# Altium PCB SUBBOARD-phase_leg_3p_2L.PcbDoc (part 1 of 2)
Units mm, origin at the board's own origin, x right, y up, seen from the top; angles counter-clockwise.
Board outline 115.25 x 128.45 mm, 2 copper layers (Top Layer, Bottom Layer), stack 1.569 mm thick; 86 components, 43 nets, 270 pads, 85 vias.
Unrouted connection lines stored in the file: 3.
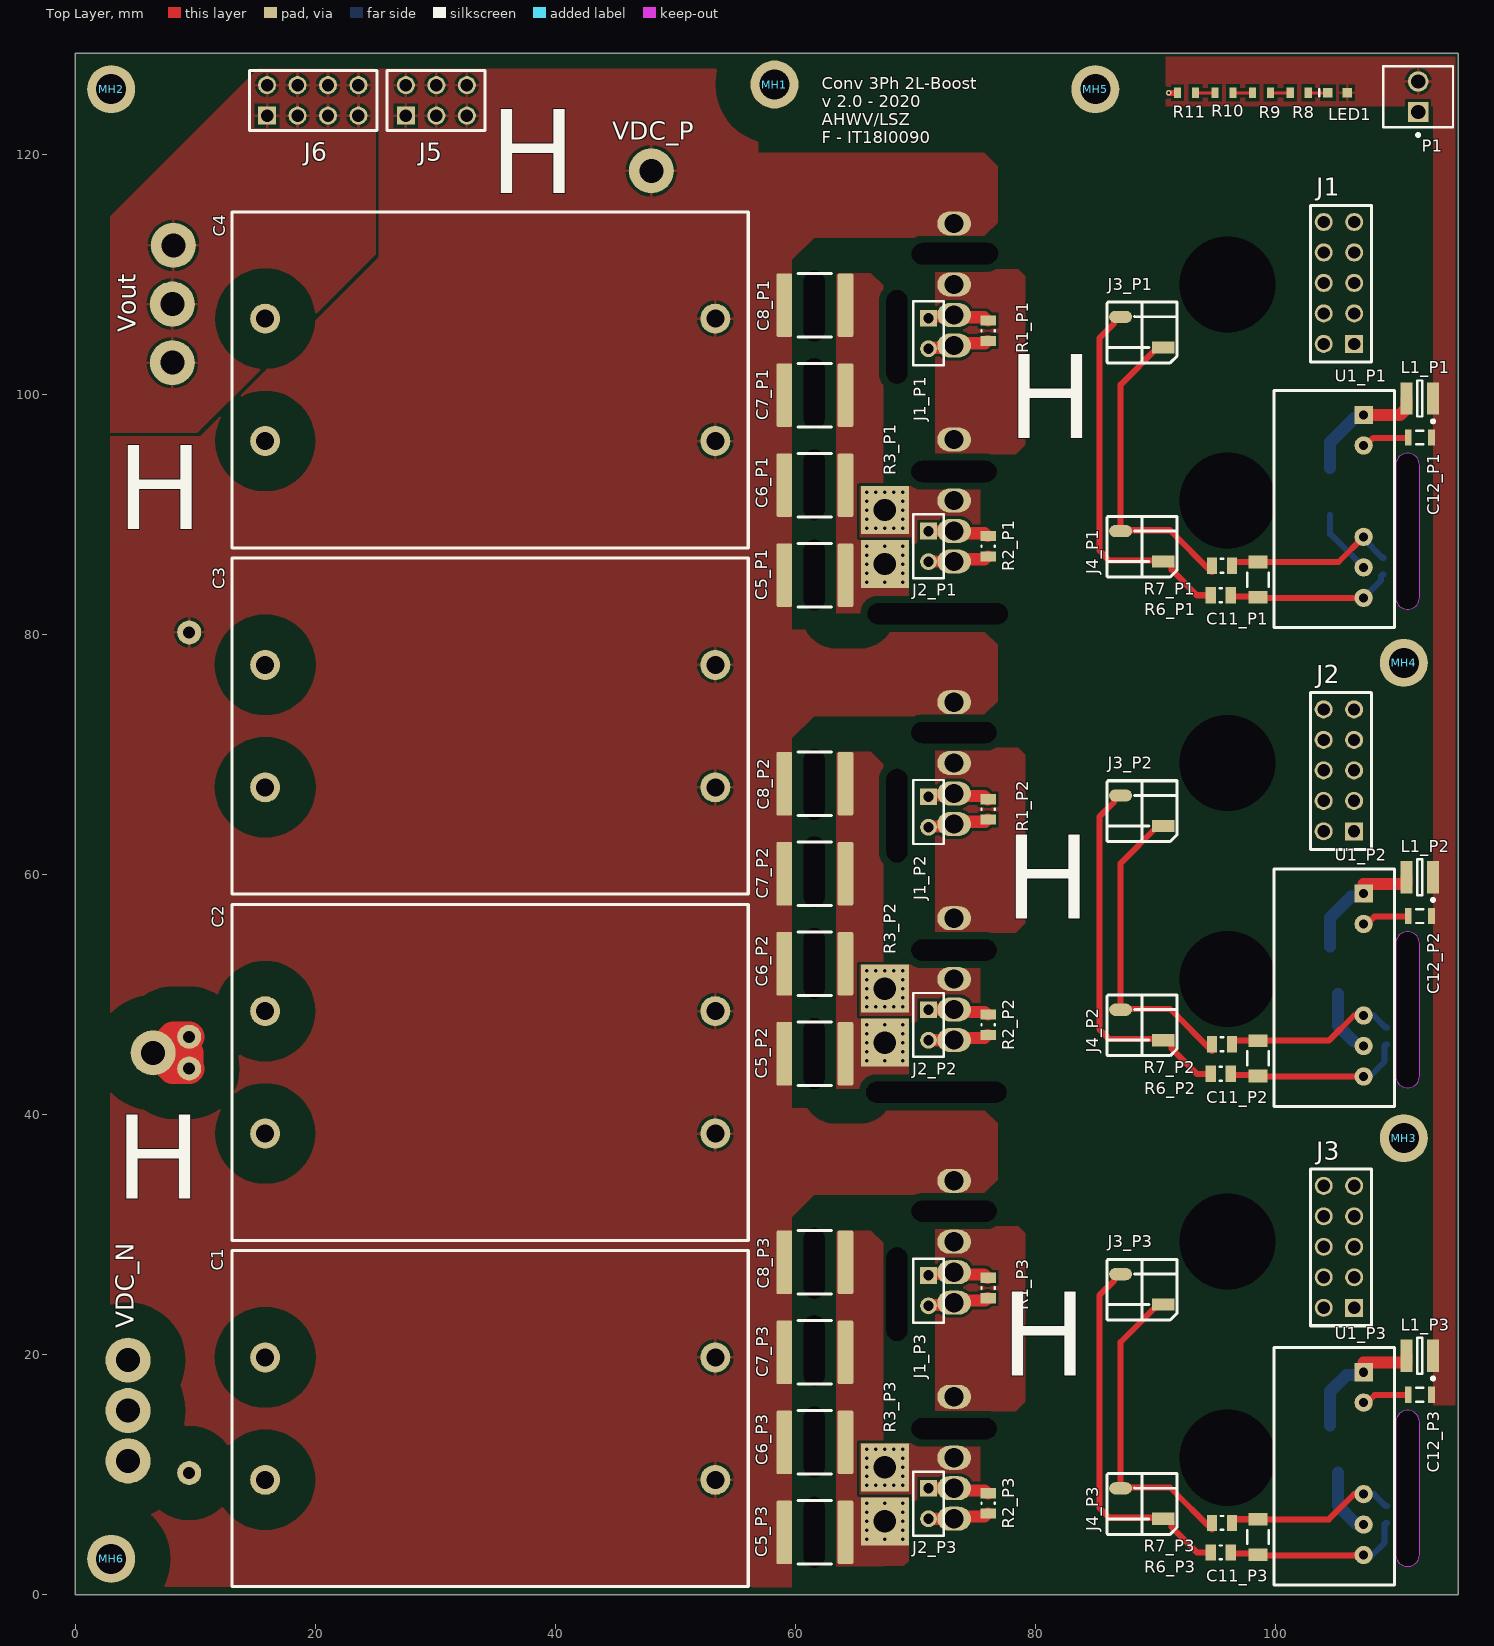
[diagram p0: Top Layer view]
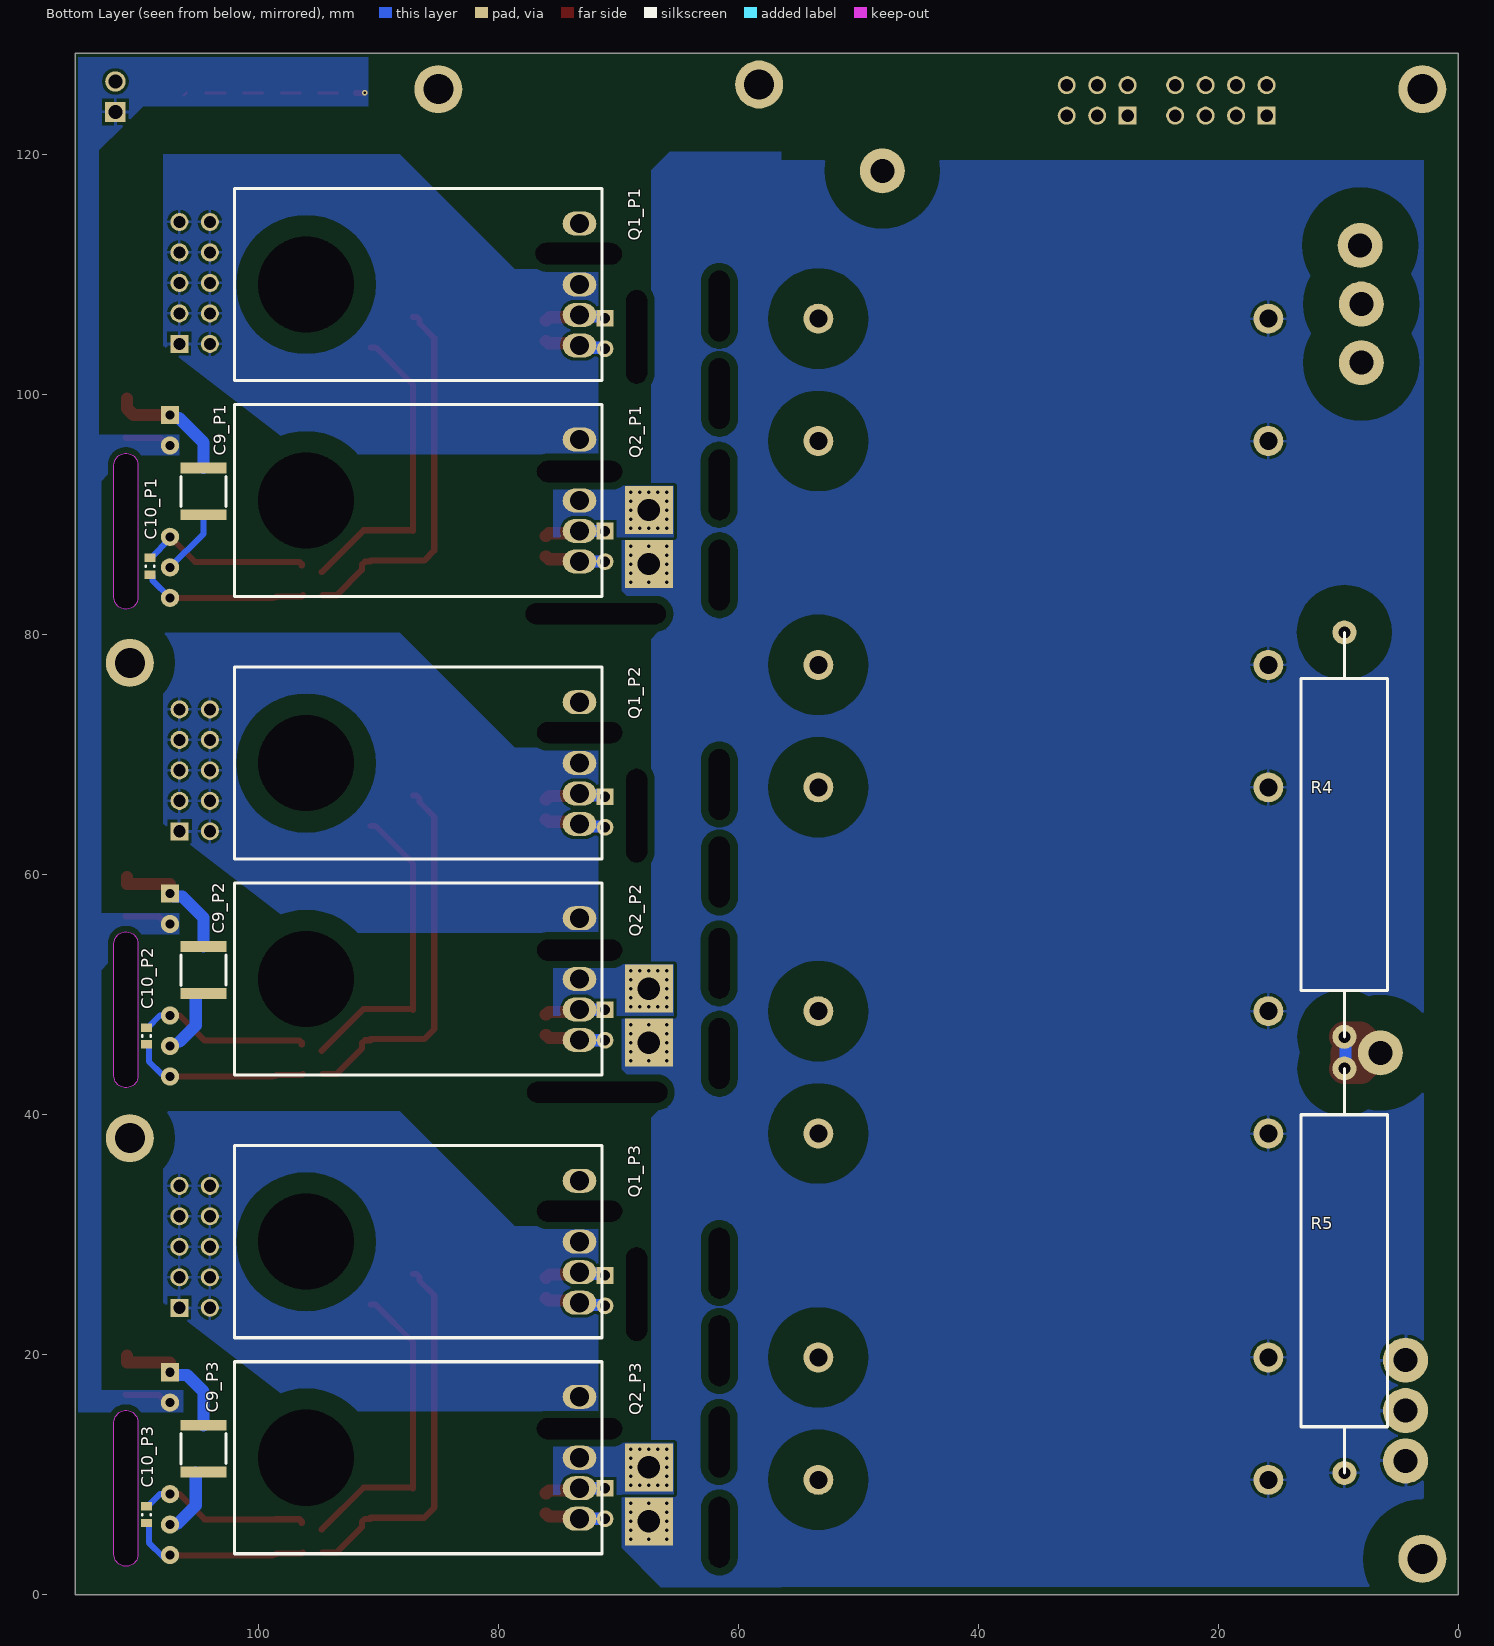
[diagram p1: Bottom Layer view, seen from below]
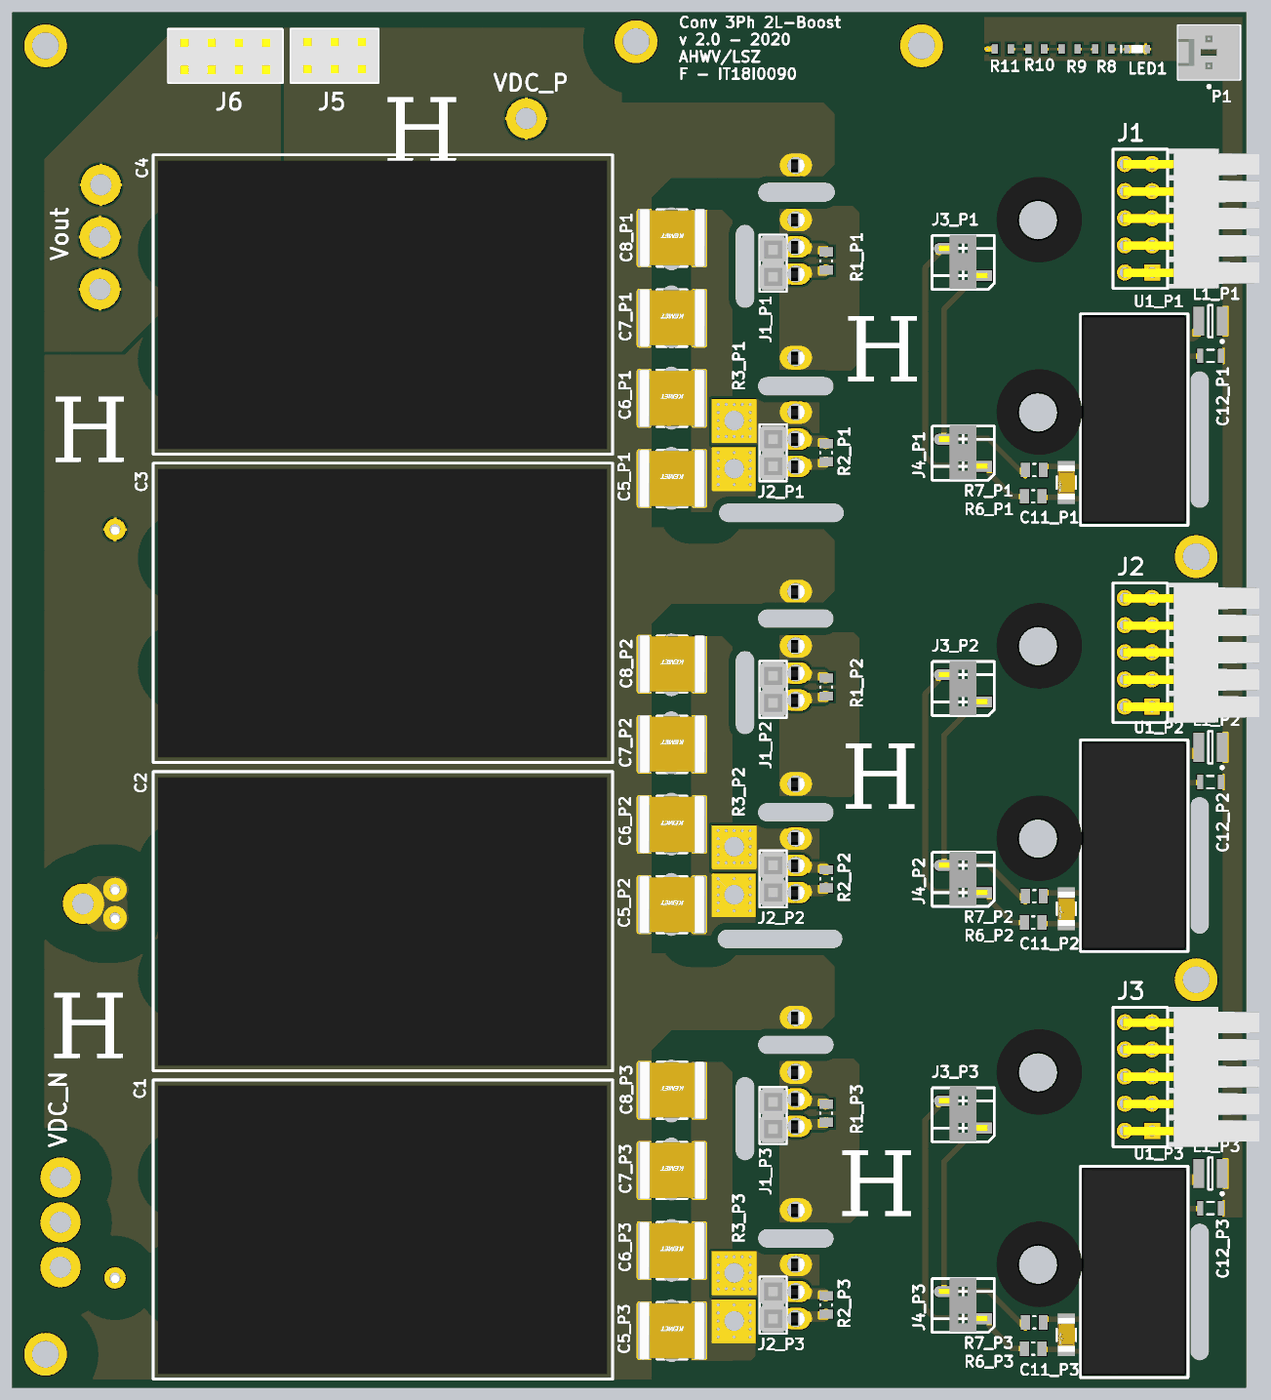
[diagram p3: 3D render of the assembled board from above, using the file's embedded part models]
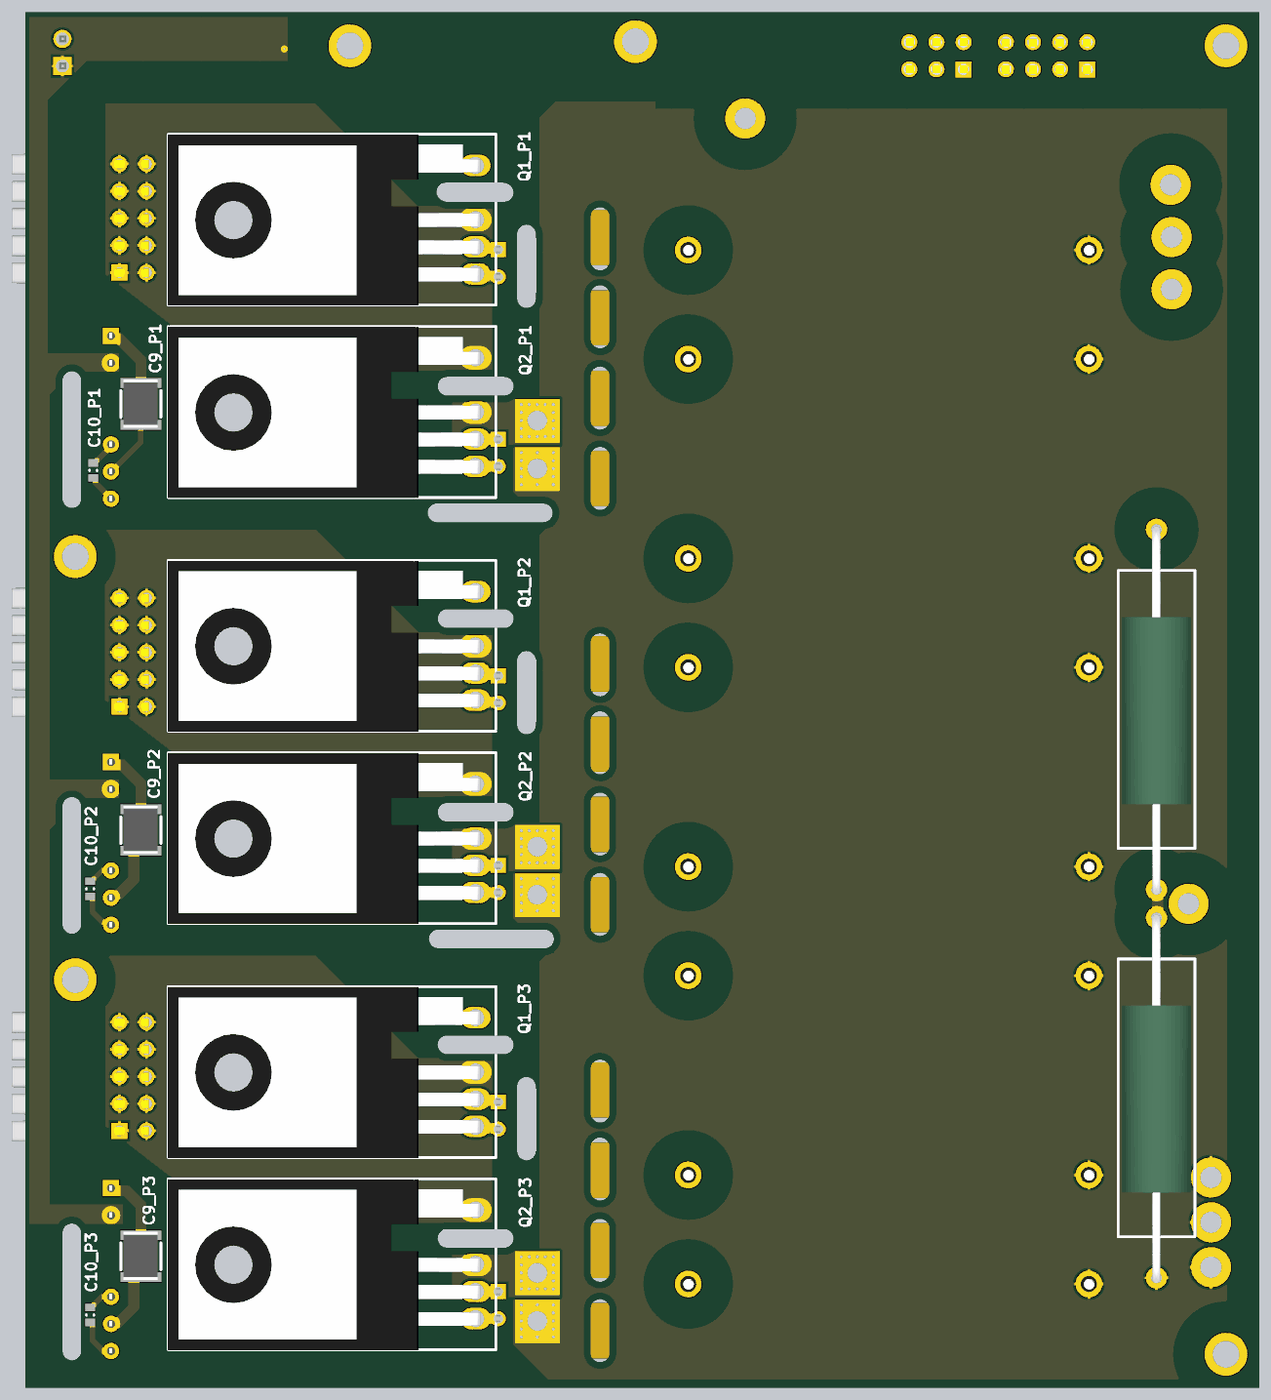
[diagram p4: 3D render of the assembled board from below, using the file's embedded part models]

## Layer stack, top to bottom
Top Solder: solder mask 0.0254, SM-001, Dk 4
Top Layer: signal copper 0.035
Dielectric 1: core 1.4986, Core-043, Dk 4.3
Bottom Layer: signal copper 0.035
Bottom Solder: solder mask 0.0254, SM-001, Dk 4

## Board outline
0,0 2.25,0 6.271,0 115.241,0 115.25,0 115.25,117.25 115.25,128.45 0,128.45
cut-out: 110.021,3.361 ccw(c111.021,3.361) 112.021,3.361 112.021,14.361 ccw(c111.021,14.361) 110.021,14.361
cut-out: 110.021,43.241 ccw(c111.021,43.241) 112.021,43.241 112.021,54.241 ccw(c111.021,54.241) 110.021,54.241
cut-out: 110.021,83.121 ccw(c111.021,83.121) 112.021,83.121 112.021,94.121 ccw(c111.021,94.121) 110.021,94.121

## Design rules (kind name [scope] priority, off if disabled: settings)
Clearance Clearance_Cutout [IsBoardCutoutRegion] p1: gap=0.254 ignorepadtopadclearanceinfootprint=FALSE except(0: Arc-Hole Track-Hole SMDPad-Hole THPad-Hole Via-Hole Fill-Hole Poly-Hole Region-Hole Text-Hole; 0.508: Fill-Fill Fill-Poly Fill-Region Poly-Poly Poly-Region Region-Region)
Clearance Clearance_Ph1 [InNet('Ph1') vs not(InNet('KS_P1') or InNet('G_P1') or InNet('CGND'))] p2: gap=1.778 ignorepadtopadclearanceinfootprint=FALSE except(0: Arc-Hole Track-Hole SMDPad-Hole THPad-Hole Via-Hole Fill-Hole Poly-Hole Region-Hole Text-Hole)
Clearance Clearance_Ph2 [InNet('Ph2') vs not(InNet('KS_P2') or InNet('G_P2') or InNet('CGND'))] p3: gap=1.778 ignorepadtopadclearanceinfootprint=FALSE except(0: Arc-Hole Track-Hole SMDPad-Hole THPad-Hole Via-Hole Fill-Hole Poly-Hole Region-Hole Text-Hole)
Clearance Clearance_Ph3 [InNet('Ph3') vs not(InNet('KS_P3') or InNet('G_P3') or InNet('CGND'))] p4: gap=1.778 ignorepadtopadclearanceinfootprint=FALSE except(0: Arc-Hole Track-Hole SMDPad-Hole THPad-Hole Via-Hole Fill-Hole Poly-Hole Region-Hole Text-Hole)
Clearance Clearance_VDC [InNet('VDCi_P') vs InNet('VDCi_N')] p5: gap=2.94 ignorepadtopadclearanceinfootprint=FALSE except(0: Arc-Hole Track-Hole SMDPad-Hole THPad-Hole Via-Hole Fill-Hole Poly-Hole Region-Hole Text-Hole)
Clearance Clearance_VDC_P [InNet('VDCi_P') vs not InNet('Vout')] p6: gap=2.94 ignorepadtopadclearanceinfootprint=FALSE except(0: Arc-Hole Track-Hole SMDPad-Hole THPad-Hole Via-Hole Fill-Hole Poly-Hole Region-Hole Text-Hole)
Clearance Clearance_VDC_N [InNet('VDCi_N') vs not (InNetClass('KS_N[1..3]') or InNetClass('G_N[1..3]') or InNetClass('SShunt[1..3]'))] p7: gap=2.94 ignorepadtopadclearanceinfootprint=FALSE except(0: Arc-Hole Track-Hole SMDPad-Hole THPad-Hole Via-Hole Fill-Hole Poly-Hole Region-Hole Text-Hole)
Clearance [All] p8: gap=0.254 ignorepadtopadclearanceinfootprint=FALSE except(0: Arc-Hole Track-Hole SMDPad-Hole THPad-Hole Via-Hole Fill-Hole Poly-Hole Region-Hole Text-Hole)
PolygonConnect PolygonConnect_16 [InComponentClass('P1')] p1: connectstyle=Direct reliefconductorwidth=0.254 reliefentries=4 polygonreliefangle="90 Angle" airgapwidth=0.254
PolygonConnect PolygonConnect_18 [InComponentClass('P3')] p2: connectstyle=Direct reliefconductorwidth=0.254 reliefentries=4 polygonreliefangle="90 Angle" airgapwidth=0.254
PolygonConnect PolygonConnect_17 [InComponentClass('P2')] p3: connectstyle=Direct reliefconductorwidth=0.254 reliefentries=4 polygonreliefangle="90 Angle" airgapwidth=0.254
PolygonConnect PolygonConnect_15 [All vs IsNamedPolygon('VOUT_L01_P117')] p4: connectstyle=Relief reliefconductorwidth=0.254 reliefentries=4 polygonreliefangle="90 Angle" airgapwidth=0.254
PolygonConnect PolygonConnect_14 [All vs IsNamedPolygon('VOUT_L01_P117')] p5: thpad.connectstyle=Direct thpad.reliefconductorwidth=0.254 thpad.reliefentries=4 thpad.polygonreliefangle="90 Angle" thpad.airgapwidth=0.254 smdpad.connectstyle=Relief smdpad.reliefconductorwidth=0.254 smdpad.reliefentries=4 smdpad.polygonreliefangle="90 Angle" smdpad.airgapwidth=0.254 via.connectstyle=Relief via.reliefconductorwidth=0.254 via.reliefentries=4 via.polygonreliefangle="90 Angle" via.airgapwidth=0.254
PolygonConnect PolygonConnect_13 [All vs IsNamedPolygon('VOUT_L01_P117')] p6: thpad.connectstyle=Relief thpad.reliefconductorwidth=0.254 thpad.reliefentries=4 thpad.polygonreliefangle="90 Angle" thpad.airgapwidth=0.254 smdpad.connectstyle=Relief smdpad.reliefconductorwidth=0.254 smdpad.reliefentries=4 smdpad.polygonreliefangle="90 Angle" smdpad.airgapwidth=0.254 via.connectstyle=Direct via.reliefconductorwidth=0.254 via.reliefentries=4 via.polygonreliefangle="90 Angle" via.airgapwidth=0.254
PolygonConnect PolygonConnect_12 [All vs IsNamedPolygon('VOUT_L01_P117')] p7: thpad.connectstyle=Direct thpad.reliefconductorwidth=0.254 thpad.reliefentries=4 thpad.polygonreliefangle="90 Angle" thpad.airgapwidth=0.254 smdpad.connectstyle=Relief smdpad.reliefconductorwidth=0.254 smdpad.reliefentries=4 smdpad.polygonreliefangle="90 Angle" smdpad.airgapwidth=0.254 via.connectstyle=Relief via.reliefconductorwidth=0.254 via.reliefentries=4 via.polygonreliefangle="90 Angle" via.airgapwidth=0.254
PolygonConnect PolygonConnect_11 [All vs IsNamedPolygon('VOUT_L01_P117')] p8: thpad.connectstyle=Relief thpad.reliefconductorwidth=0.254 thpad.reliefentries=4 thpad.polygonreliefangle="90 Angle" thpad.airgapwidth=0.254 smdpad.connectstyle=Relief smdpad.reliefconductorwidth=0.254 smdpad.reliefentries=4 smdpad.polygonreliefangle="90 Angle" smdpad.airgapwidth=0.254 via.connectstyle=Direct via.reliefconductorwidth=0.254 via.reliefentries=4 via.polygonreliefangle="90 Angle" via.airgapwidth=0.254
PolygonConnect PolygonConnect_10 [All vs IsNamedPolygon('VOUT_L01_P117')] p9: thpad.connectstyle=Relief thpad.reliefconductorwidth=0.254 thpad.reliefentries=4 thpad.polygonreliefangle="90 Angle" thpad.airgapwidth=0.254 smdpad.connectstyle=Relief smdpad.reliefconductorwidth=0.254 smdpad.reliefentries=4 smdpad.polygonreliefangle="90 Angle" smdpad.airgapwidth=0.254 via.connectstyle=Direct via.reliefconductorwidth=0.254 via.reliefentries=4 via.polygonreliefangle="90 Angle" via.airgapwidth=0.254
PolygonConnect PolygonConnect_9 [All vs IsNamedPolygon('VOUT_L01_P117')] p10: thpad.connectstyle=Relief thpad.reliefconductorwidth=0.254 thpad.reliefentries=4 thpad.polygonreliefangle="90 Angle" thpad.airgapwidth=0.254 smdpad.connectstyle=Relief smdpad.reliefconductorwidth=0.254 smdpad.reliefentries=4 smdpad.polygonreliefangle="90 Angle" smdpad.airgapwidth=0.254 via.connectstyle=Direct via.reliefconductorwidth=0.254 via.reliefentries=4 via.polygonreliefangle="90 Angle" via.airgapwidth=0.254
PolygonConnect PolygonConnect_8 [All vs IsNamedPolygon('GND_L02_P115')] p11: thpad.connectstyle=Direct thpad.reliefconductorwidth=0.254 thpad.reliefentries=4 thpad.polygonreliefangle="90 Angle" thpad.airgapwidth=0.254 smdpad.connectstyle=Relief smdpad.reliefconductorwidth=0.254 smdpad.reliefentries=4 smdpad.polygonreliefangle="90 Angle" smdpad.airgapwidth=0.254 via.connectstyle=Relief via.reliefconductorwidth=0.254 via.reliefentries=4 via.polygonreliefangle="90 Angle" via.airgapwidth=0.254
PolygonConnect PolygonConnect_7 [All vs IsNamedPolygon('VCC_24V_L01_P113')] p12: thpad.connectstyle=Direct thpad.reliefconductorwidth=0.254 thpad.reliefentries=4 thpad.polygonreliefangle="90 Angle" thpad.airgapwidth=0.254 smdpad.connectstyle=Relief smdpad.reliefconductorwidth=0.254 smdpad.reliefentries=4 smdpad.polygonreliefangle="90 Angle" smdpad.airgapwidth=0.254 via.connectstyle=Relief via.reliefconductorwidth=0.254 via.reliefentries=4 via.polygonreliefangle="90 Angle" via.airgapwidth=0.254
PolygonConnect PolygonConnect_6 [All vs IsNamedPolygon('VDCi_N_P1_L-01_P-002')] p13: thpad.connectstyle=Direct thpad.reliefconductorwidth=0.254 thpad.reliefentries=4 thpad.polygonreliefangle="90 Angle" thpad.airgapwidth=0.254 smdpad.connectstyle=Relief smdpad.reliefconductorwidth=0.254 smdpad.reliefentries=4 smdpad.polygonreliefangle="90 Angle" smdpad.airgapwidth=0.254 via.connectstyle=Relief via.reliefconductorwidth=0.254 via.reliefentries=4 via.polygonreliefangle="90 Angle" via.airgapwidth=0.254
PolygonConnect PolygonConnect_5 [All vs IsNamedPolygon('VDCI_N_L01_P110')] p14: thpad.connectstyle=Direct thpad.reliefconductorwidth=0.254 thpad.reliefentries=4 thpad.polygonreliefangle="90 Angle" thpad.airgapwidth=0.254 smdpad.connectstyle=Relief smdpad.reliefconductorwidth=0.254 smdpad.reliefentries=4 smdpad.polygonreliefangle="90 Angle" smdpad.airgapwidth=0.254 via.connectstyle=Relief via.reliefconductorwidth=0.254 via.reliefentries=4 via.polygonreliefangle="90 Angle" via.airgapwidth=0.254
PolygonConnect PolygonConnect_4 [All vs IsNamedPolygon('VDCi_N_P1_L-01_P-002')] p15: thpad.connectstyle=Direct thpad.reliefconductorwidth=0.254 thpad.reliefentries=4 thpad.polygonreliefangle="90 Angle" thpad.airgapwidth=0.254 smdpad.connectstyle=Relief smdpad.reliefconductorwidth=0.254 smdpad.reliefentries=4 smdpad.polygonreliefangle="90 Angle" smdpad.airgapwidth=0.254 via.connectstyle=Relief via.reliefconductorwidth=0.254 via.reliefentries=4 via.polygonreliefangle="90 Angle" via.airgapwidth=0.254
PolygonConnect PolygonConnect_3 [All vs IsNamedPolygon('VDCi_N_P1_L-01_P-002')] p16: thpad.connectstyle=Direct thpad.reliefconductorwidth=0.254 thpad.reliefentries=4 thpad.polygonreliefangle="90 Angle" thpad.airgapwidth=0.254 smdpad.connectstyle=Relief smdpad.reliefconductorwidth=0.254 smdpad.reliefentries=4 smdpad.polygonreliefangle="90 Angle" smdpad.airgapwidth=0.254 via.connectstyle=Relief via.reliefconductorwidth=0.254 via.reliefentries=4 via.polygonreliefangle="90 Angle" via.airgapwidth=0.254
PolygonConnect PolygonConnect_2 [All vs IsNamedPolygon('Ph2_L-01_P-001')] p17: connectstyle=Relief reliefconductorwidth=0.254 reliefentries=4 polygonreliefangle="90 Angle" airgapwidth=0.254
PolygonConnect PolygonConnect_1 [All vs IsNamedPolygon('SShunt1_L-01_P-001')] p18: connectstyle=Relief reliefconductorwidth=0.254 reliefentries=4 polygonreliefangle="90 Angle" airgapwidth=0.254
PolygonConnect PolygonConnect_bypasscap [InPolygonClass('NoThermalRelief_Poly')] p19: connectstyle=Direct reliefconductorwidth=0.254 reliefentries=4 polygonreliefangle="90 Angle" airgapwidth=0.254
PolygonConnect PolygonConnect_S [InNet('S2')] p20: connectstyle=Direct reliefconductorwidth=0.254 reliefentries=4 polygonreliefangle="90 Angle" airgapwidth=0.254
PolygonConnect [All] p21: thpad.connectstyle=Relief thpad.reliefconductorwidth=0.254 thpad.reliefentries=4 thpad.polygonreliefangle="90 Angle" thpad.airgapwidth=0.254 smdpad.connectstyle=Relief smdpad.reliefconductorwidth=0.254 smdpad.reliefentries=4 smdpad.polygonreliefangle="90 Angle" smdpad.airgapwidth=0.254 via.connectstyle=Direct via.reliefconductorwidth=0.254 via.reliefentries=4 via.polygonreliefangle="90 Angle" via.airgapwidth=0.254
RoomDefinition P2 [InComponentClass('P2')] p1: confinementstyle=ConfineIn formatcopy=TRUE lockcomponents=FALSE outline 115.1,80.4 56.41,80.4 56.41,40.518 115.1,40.518
RoomDefinition P1 [InComponentClass('P1')] p2: confinementstyle=ConfineIn formatcopy=TRUE lockcomponents=FALSE outline 115.1,120.28 56.41,120.28 56.41,80.398 115.1,80.398
RoomDefinition U_DC_link_2L [InComponentClass('U_DC_link_2L')] p3: confinementstyle=ConfineIn formatcopy=TRUE lockcomponents=FALSE outline 56.24,147.85 0.47,147.85 0.47,-4.372 56.24,-4.372
RoomDefinition SUBBOARD-phase_leg_3p_2L [InComponentClass('SUBBOARD-phase_leg_3p_2L')] p4: confinementstyle=ConfineIn formatcopy=TRUE lockcomponents=FALSE outline -3.61,-6.53 127.44,-6.53 127.44,132.62 -3.61,132.62
RoomDefinition P3 [InComponentClass('P3')] p5: confinementstyle=ConfineIn formatcopy=TRUE lockcomponents=FALSE outline 115.1,40.52 56.41,40.52 56.41,0.638 115.1,0.638
RoutingVias [All] p1: holewidth=0.5 width=0.3 viastyle="Through Hole" minholewidth=0.5 minwidth=0.3 maxholewidth=4 maxwidth=2
SolderMaskExpansion [All] p1: expansion=0.102 istentingtop=FALSE
Width Width_Ph [InNet('Phi_a') or InNet('Phi_b') or InNet('Phi_c')] p1: maxlimit=2.54 minlimit=0.254 preferedwidth=1.27
Width Width_VDC [InNet('VDCi_P') or InNet('VDCi_N')] p2: maxlimit=5.08 minlimit=0.254 preferedwidth=0.254 minimp=50.000000 maximp=50.000000 favimp=50.000000
Width [All] p3: maxlimit=2.54 minlimit=0.254 preferedwidth=0.254
30 further rules are at their usual default settings.

## Classes and differential pairs
component class SUBBOARD-phase_leg_3p_2L: J1 J2 J3 J5 J6 LED1 MH1 MH2 MH3 MH4 MH5 MH6 P1 R8 R9 R10 R11
net class Ph[1..3]: Ph1 Ph2 Ph3
net class KS_P[1..3]: KS_P1 KS_P2 KS_P3
net class KS_N[1..3]: KS_N1 KS_N2 KS_N3
net class G_P[1..3]: G_P1 G_P2 G_P3
net class G_N[1..3]: G_N1 G_N2 G_N3
net class SShunt[1..3]: SShunt1 SShunt2 SShunt3
channel class phase_leg_single_2L: P1 P2 P3
component class P3: C5_P3 C6_P3 C7_P3 C8_P3 C9_P3 C10_P3 C11_P3 C12_P3 J1_P3 J2_P3 J3_P3 J4_P3 L1_P3 Q1_P3 Q2_P3 R1_P3 R2_P3 R3_P3 R6_P3 R7_P3 U1_P3
component class P2: C5_P2 C6_P2 C7_P2 C8_P2 C9_P2 C10_P2 C11_P2 C12_P2 J1_P2 J2_P2 J3_P2 J4_P2 L1_P2 Q1_P2 Q2_P2 R1_P2 R2_P2 R3_P2 R6_P2 R7_P2 U1_P2
component class P1: C5_P1 C6_P1 C7_P1 C8_P1 C9_P1 C10_P1 C11_P1 C12_P1 J1_P1 J2_P1 J3_P1 J4_P1 L1_P1 Q1_P1 Q2_P1 R1_P1 R2_P1 R3_P1 R6_P1 R7_P1 U1_P1
component class U_DC_link_2L: C1 C2 C3 C4 R4 R5

## Components (designator, comment, footprint, x,y, rotation, side; value= is the part's Value field where it differs from the comment)
C1 "MKP1848S55010JP4B" MKP1848S55010JP4B 53.332,19.78 r180 top
C2 "MKP1848S55010JP4B" MKP1848S55010JP4B 53.332,48.631 r180 top
C3 "MKP1848S55010JP4B" MKP1848S55010JP4B 53.332,77.483 r180 top
C4 "MKP1848S55010JP4B" MKP1848S55010JP4B 53.332,106.334 r180 top
C5_P1 "C2220C102JGGACTU" C_2220_L_C2220C102JGGACTU 61.632,84.961 r180 top (schematic designator C5)
C5_P2 "C2220C102JGGACTU" C_2220_L_C2220C102JGGACTU 61.632,45.081 r180 top (schematic designator C5)
C5_P3 "C2220C102JGGACTU" C_2220_L_C2220C102JGGACTU 61.632,5.201 r180 top (schematic designator C5)
C6_P1 "C2220C103KDRACTU" C_2220_L_C2220C103KDRACTU 61.632,92.461 r180 top (schematic designator C6)
C6_P2 "C2220C103KDRACTU" C_2220_L_C2220C103KDRACTU 61.632,52.581 r180 top (schematic designator C6)
C6_P3 "C2220C103KDRACTU" C_2220_L_C2220C103KDRACTU 61.632,12.701 r180 top (schematic designator C6)
C7_P1 "C2220C104KDRACTU" C_2220_L_C2220C104KDRACTU 61.632,99.961 r180 top (schematic designator C7)
C7_P2 "C2220C104KDRACTU" C_2220_L_C2220C104KDRACTU 61.632,60.081 r180 top (schematic designator C7)
C7_P3 "C2220C104KDRACTU" C_2220_L_C2220C104KDRACTU 61.632,20.201 r180 top (schematic designator C7)
C8_P1 "C2220C104KDRACTU" C_2220_L_C2220C104KDRACTU 61.632,107.461 r180 top (schematic designator C8)
C8_P2 "C2220C104KDRACTU" C_2220_L_C2220C104KDRACTU 61.632,67.581 r180 top (schematic designator C8)
C8_P3 "C2220C104KDRACTU" C_2220_L_C2220C104KDRACTU 61.632,27.701 r180 top (schematic designator C8)
C9_P1 "885352211001" 885352211001 104.559,91.939 r90 bottom (schematic designator C9)
C9_P2 "885352211001" 885352211001 104.559,52.059 r90 bottom (schematic designator C9)
C9_P3 "885352211001" 885352211001 104.559,12.179 r90 bottom (schematic designator C9)
C10_P1 "CAP 100nF 50V 0603(1608)" CAPC0603(1608)100_L 109.02,85.71 r270 bottom value=100nF (schematic designator C10)
C10_P2 "CAP 100nF 50V 0603(1608)" CAPC0603(1608)100_L 109.309,46.559 r270 bottom value=100nF (schematic designator C10)
C10_P3 "CAP 100nF 50V 0603(1608)" CAPC0603(1608)100_L 109.309,6.679 r270 bottom value=100nF (schematic designator C10)
C11_P1 "GRT31CR61H106KE01L" FP-GRT31-0_2-MFG 98.551,84.578 r270 top value=10uF (schematic designator C11)
C11_P2 "GRT31CR61H106KE01L" FP-GRT31-0_2-MFG 98.551,44.698 r270 top value=10uF (schematic designator C11)
C11_P3 "GRT31CR61H106KE01L" FP-GRT31-0_2-MFG 98.551,4.818 r270 top value=10uF (schematic designator C11)
C12_P1 "C2012X7R1H225K125AC" CAPC2013X145X20LL20 112.035,96.432 r180 top (schematic designator C12)
C12_P2 "C2012X7R1H225K125AC" CAPC2013X145X20LL20 112.035,56.552 r180 top (schematic designator C12)
C12_P3 "C2012X7R1H225K125AC" CAPC2013X145X20LL20 112.035,16.672 r180 top (schematic designator C12)
J1 "IPS1-105-01-L-D-RA" IPS1-105-01-L-D-RA 106.569,104.23 r180 top
J1_P1 "SLW-102-01-T-S" SMTC-SLW-102-01-X-S 71.102,106.373 r270 top (schematic designator J1)
J1_P2 "SLW-102-01-T-S" SMTC-SLW-102-01-X-S 71.102,66.493 r270 top (schematic designator J1)
J1_P3 "SLW-102-01-T-S" SMTC-SLW-102-01-X-S 71.102,26.613 r270 top (schematic designator J1)
J2 "IPS1-105-01-L-D-RA" IPS1-105-01-L-D-RA 106.564,63.615 r180 top
J2_P1 "SLW-102-01-T-S" SMTC-SLW-102-01-X-S 71.102,88.63 r270 top (schematic designator J2)
J2_P2 "SLW-102-01-T-S" SMTC-SLW-102-01-X-S 71.102,48.75 r270 top (schematic designator J2)
J2_P3 "SLW-102-01-T-S" SMTC-SLW-102-01-X-S 71.102,8.87 r270 top (schematic designator J2)
J3 "IPS1-105-01-L-D-RA" IPS1-105-01-L-D-RA 106.568,23.915 r180 top
J3_P1 "SSM-102-L-SV" SSM-102-L-SV 90.659,103.938 r180 top (schematic designator J3)
J3_P2 "SSM-102-L-SV" SSM-102-L-SV 90.659,64.058 r180 top (schematic designator J3)
J3_P3 "SSM-102-L-SV" SSM-102-L-SV 90.659,24.178 r180 top (schematic designator J3)
J4_P1 "SSM-102-L-SV" SSM-102-L-SV 90.659,86.09 r180 top (schematic designator J4)
J4_P2 "SSM-102-L-SV" SSM-102-L-SV 90.659,46.21 r180 top (schematic designator J4)
J4_P3 "SSM-102-L-SV" SSM-102-L-SV 90.659,6.33 r180 top (schematic designator J4)
J5 "SSW-103-01-G-D" SSW-103-01-G-D 27.555,123.25 r90 top
J6 "SSW-104-01-G-D" SSW-104-01-G-D 15.982,123.25 r90 top
L1_P1 "SRN3015-470M" BOUR-SRN3015-2_V 112.035,99.682 r180 top (schematic designator L1)
L1_P2 "SRN3015-470M" BOUR-SRN3015-2_V 112.035,59.802 r180 top (schematic designator L1)
L1_P3 "SRN3015-470M" BOUR-SRN3015-2_V 112.035,19.922 r180 top (schematic designator L1)
LED1 "150060BS75000" 0603_A 105.175,125.15 r0 top
MH1 "_MH_2p5_4-round" _MH_2P5_4-ROUND 58.266,123.115 r0 top
MH2 "_MH_2p5_4-round" _MH_2p5_4-round#1 4.7,125.15 r270 top
MH3 "_MH_2p5_4-round" _MH_2p5_4-round#2 110.7,38.05 r0 top
MH4 "_MH_2p5_4-round" _MH_2p5_4-round#3 110.4,77.65 r0 top
MH5 "_MH_2p5_4-round" _MH_2p5_4-round#4 85.9,125.15 r0 top
MH6 "_MH_2p5_4-round" _MH_2p5_4-round#5 4.7,2.75 r0 top
P1 "22-27-2021" MOLX-22-27-2021_V 111.9,124.825 r90 top
Q1_P1 "SCT3105KR" TO-247-4L_HSA 73.231,114.258 r270 bottom (schematic designator Q1)
Q1_P2 "SCT3105KR" TO-247-4L_HSA 73.231,74.378 r270 bottom (schematic designator Q1)
Q1_P3 "SCT3105KR" TO-247-4L_HSA 73.231,34.498 r270 bottom (schematic designator Q1)
Q2_P1 "SCT3105KR" TO-247-4L_HSA 73.231,96.258 r270 bottom (schematic designator Q2)
Q2_P2 "SCT3105KR" TO-247-4L_HSA 73.231,56.378 r270 bottom (schematic designator Q2)
Q2_P3 "SCT3105KR" TO-247-4L_HSA 73.231,16.498 r270 bottom (schematic designator Q2)
R1_P1 "10K 5% 0805(2012)" RESC0805(2012)_L 76.062,105.322 r90 top value="10000.00 Ohm" (schematic designator R1)
R1_P2 "10K 5% 0805(2012)" RESC0805(2012)_L 76.062,65.442 r90 top value="10000.00 Ohm" (schematic designator R1)
R1_P3 "10K 5% 0805(2012)" RESC0805(2012)_L 76.062,25.562 r90 top value="10000.00 Ohm" (schematic designator R1)
R2_P1 "10K 5% 0805(2012)" RESC0805(2012)_L 76.062,87.372 r270 top value="10000.00 Ohm" (schematic designator R2)
R2_P2 "10K 5% 0805(2012)" RESC0805(2012)_L 76.062,47.492 r270 top value="10000.00 Ohm" (schematic designator R2)
R2_P3 "10K 5% 0805(2012)" RESC0805(2012)_L 76.062,7.612 r270 top value="10000.00 Ohm" (schematic designator R2)
R3_P1 "SDN-414" SDN-414 67.457,90.381 r270 top (schematic designator R3)
R3_P2 "SDN-414" SDN-414 67.457,50.501 r270 top (schematic designator R3)
R3_P3 "SDN-414" SDN-414 67.457,10.621 r270 top (schematic designator R3)
R4 "ROX5SSJ51K" RES_ROX5SS 9.5,63.343 r90 bottom value="51 kOhm"
R5 "ROX5SSJ51K" RES_ROX5SS 9.5,27 r90 bottom value="51 kOhm"
R6_P1 "CRCW08050000Z0EA" RESC2013X50X30LL20T20 95.451,83.288 r0 top value="0 Ohm" (schematic designator R6)
R6_P2 "CRCW08050000Z0EA" RESC2013X50X30LL20T20 95.451,43.408 r0 top value="0 Ohm" (schematic designator R6)
R6_P3 "CRCW08050000Z0EA" RESC2013X50X30LL20T20 95.451,3.528 r0 top value="0 Ohm" (schematic designator R6)
R7_P1 "CRCW08050000Z0EA" RESC2013X50X30LL20T20 95.551,85.748 r180 top value="0 Ohm" (schematic designator R7)
R7_P2 "CRCW08050000Z0EA" RESC2013X50X30LL20T20 95.551,45.868 r180 top value="0 Ohm" (schematic designator R7)
R7_P3 "CRCW08050000Z0EA" RESC2013X50X30LL20T20 95.551,5.988 r180 top value="0 Ohm" (schematic designator R7)
R8 "200 Ohm" CRCW0603200RFKEAHP 102,125.15 r180 top
R9 "200 Ohm" CRCW0603200RFKEAHP 98.855,125.15 r180 top
R10 "200 Ohm" CRCW0603200RFKEAHP 95.725,125.15 r180 top
R11 "200 Ohm" CRCW0603200RFKEAHP 92.6,125.15 r180 top
U1_P1 "R24P21503D" SIP-7_R05P22005D 107.355,98.308 r270 top (schematic designator U1)
U1_P2 "R24P21503D" SIP-7_R05P22005D 107.355,58.428 r270 top (schematic designator U1)
U1_P3 "R24P21503D" SIP-7_R05P22005D 107.355,18.548 r270 top (schematic designator U1)

## Footprints (in the part's own frame and the unit in brackets; to place one, negate y for a bottom-side part, rotate by r counter-clockwise, add the part's x,y. Pads: shape width x height; smd on the part's side, far side on the other; paste and mask are expansions set on the pad)
0603_A [mm] "Chip LED, 2-Leads, Body 1.6x0.8mm, IPC Medium Density"
  rect 0.8x0.8 smd: 1(-0.8,0) 2(0.8,0)
  silkscreen extent -1.5,-0.3 -1.5,0.3, body extent -0.8,-0.4 0.8,0.4, height 0.7
885352211001 [mm] "Multilayer Ceramic Capacitors MLCC - SMD/SMT WCAP-CSSA X&Y Safety 470pF 5kV 10% 1812"
  rect 0.9x3.8 smd: 1(-1.95,0) 2(1.95,0)
  silkscreen extent -1.28,-1.88 1.25,1.88, body extent -2.23,-1.57 2.27,1.63, height 1.6
_MH_2P5_4-ROUND [mm] "Matching hole, 2.5mm hole, 4mm pad (round)"
  round 4 hole 2.5: *(0,2.725)
_MH_2p5_4-round#1 [mm] "Matching hole, 2.5mm hole, 4mm pad (round)"
  round 4 hole 2.5: *(-0.3,-1.7)
_MH_2p5_4-round#2 [mm] "Matching hole, 2.5mm hole, 4mm pad (round)"
  round 4 hole 2.5: *(0,0)
_MH_2p5_4-round#3 [mm] "Matching hole, 2.5mm hole, 4mm pad (round)"
  round 4 hole 2.5: *(0.3,0)
_MH_2p5_4-round#4 [mm] "Matching hole, 2.5mm hole, 4mm pad (round)"
  round 4 hole 2.5: *(-0.9,0.3)
_MH_2p5_4-round#5 [mm] "Matching hole, 2.5mm hole, 4mm pad (round)"
  round 4 hole 2.5: *(-1.7,0.25)
BOUR-SRN3015-2_V [mm] "SMD, 2-Leads, Body 3x3mm, Height 1.5mm"
  rect 1x2.7 smd: 1(-1.1,0) 2(1.1,0)
  silkscreen extent -1.23,-1.5 0.2,2.02, body extent -1.5,-1.5 1.5,1.5, height 1.5
C_2220_L_C2220C102JGGACTU [mm] "Capacitor 2220 package (Density Least) C2220C102JGGACTU"
  rrect20% 1.3x5.3 smd: 1(-2.55,0) 2(2.55,0)
  silkscreen extent -1.4,-2.65 1.4,2.65, body extent -3.05,-2.7 3.05,2.7, height 1.8
C_2220_L_C2220C103KDRACTU [mm] "Capacitor 2220 package (Density Least) C2220C103KDRACTU"
  rrect20% 1.3x5.3 smd: 1(-2.55,0) 2(2.55,0)
  silkscreen extent -1.4,-2.65 1.4,2.65, body extent -3.05,-2.7 3.05,2.7, height 1.55
C_2220_L_C2220C104KDRACTU [mm] "Capacitor 2220 package (Density Least) C2220C104KDRACTU"
  rrect20% 1.3x5.3 smd: 1(-2.55,0) 2(2.55,0)
  silkscreen extent -1.4,-2.65 1.4,2.65, body extent -3.07,-2.72 3.02,2.68, height 2.7
CAPC0603(1608)100_L [mm] "Chip Capacitor, Body 1.6x0.8mm, Height 1.0mm, IPC High Density"
  rect 0.7x0.9 smd: 1(-0.7,0) 2(0.7,0)
  silkscreen extent -0.05,-0.35 0.05,0.35, body extent -0.87,-0.47 0.88,0.48, height 1
CAPC2013X145X20LL20 [mm] "Chip Capacitor, 2-Leads, Body 2.20x1.45mm, IPC High Density"
  rect 0.55x1.35 smd: 1(-0.975,0) 2(0.975,0)
  silkscreen extent -0.3,-0.58 0.3,0.58, body extent -1.1,-0.72 1.1,0.72, height 1.45
CRCW0603200RFKEAHP [mm] "RES SMD 200 OHM 1% 1/3W 0603"
  rect 0.6x0.9 smd: 1(-0.75,0) 2(0.75,0)
  body extent -0.75,-0.48 0.75,0.48, height 0.55
FP-GRT31-0_2-MFG [mm]
  rect 1.05x1.6 smd paste+0 mask+0: 1(-1.475,0) 2(1.475,0)
  silkscreen extent -0.58,-0.9 0.58,0.9, body extent -1.6,-0.8 1.6,0.8, height 1.8
IPS1-105-01-L-D-RA [mm]
  rect 1.5x1.5 hole 1.02: 1(0,0)
  round 1.5 hole 1.02: 2(2.54,0) 3(0,-2.54) 4(2.54,-2.54) 5(0,-5.08) 6(2.54,-5.08) 7(0,-7.62) 8(2.54,-7.62) 9(0,-10.16) 10(2.54,-10.16)
  silkscreen extent -1.45,-11.55 3.65,1.5, body extent -10.03,-11.59 2.74,1.49, height 4.97
MKP1848S55010JP4B [mm] "Film Capacitors 5uF 5% 1000volts 4pins 37.5mm LS"
  round 2.5 hole 1.5: 1(0,10.2) 1(0,0) 2(37.5,0) 2(37.5,10.2)
  silkscreen extent -2.75,-8.9 40.25,19.1, body extent -2.22,-8.38 39.78,18.62, height 18
MOLX-22-27-2021_V [mm] "Header, 2-Leads, Body 5.8x5.08mm"
  rect 1.7x1.7 hole 1.19: 1(-1.27,0)
  round 1.7 hole 1.19: 2(1.27,0)
  silkscreen extent -3.31,-2.9 2.54,2.9, body extent -2.54,-2.9 2.54,2.9, height 11.72
RES_ROX5SS [mm] "ROX5SS resistor"
  round 2 hole 1: 1(-16.85,0) 2(16.85,0)
  silkscreen extent -16.85,-3.6 16.85,3.6, body extent -17.34,-3.22 17.14,3.28, height 8.25
RESC0805(2012)_L [mm] "Chip Resistor, Body 2.0x1.3mm, IPC High Density"
  rect 0.85x1.3 smd: 1(-0.85,0) 2(0.85,0)
  silkscreen extent -0.05,-0.55 0.05,0.55, body extent -1.1,-0.67 1.1,0.68, height 0.7
RESC2013X50X30LL20T20 [mm] "Chip Resistor, 2-Leads, Body 2.00x1.25mm, IPC High Density"
  rect 0.85x1.35 smd: 1(-0.825,0) 2(0.825,0)
  silkscreen extent -0.1,-0.58 0.1,0.58, body extent -1.1,-0.72 1.1,0.72, height 0.5
SDN-414 [mm]
  rect 4x4 hole 1.85: 1(0,0) 2(4.5,0)
SIP-7_R05P22005D [mil] "Isolated Module DC DC Converter 2 Output 20V -5V 50mA, 200mA 4.5V - 5.5V Input"
  rect 60x60 hole 30: 1(0,0)
  round 60 hole 30: 2(100,0) 5(400,0) 6(500,0) 7(600,0)
  silkscreen extent -81,-294 698,101, body extent -76,-291 692,95, height 472
SMTC-SLW-102-01-X-S [mm] "Low Profile Socket Strip, 1x2 Pins, Vertical, 2.54mm Pitch, Female"
  rect 1.4x1.4 hole 0.86: 1(0,0)
  round 1.4 hole 0.86: 2(2.54,0)
  silkscreen extent -1.4,-1.27 3.94,1.27, body extent -1.27,-1.27 3.81,1.27, height 4.57
SSM-102-L-SV [mm]
  rect 1.905x1.02 smd: 1(0,0)
  oval 1.905x1.02 smd: 2(3.555,-2.54)
  silkscreen extent -1.14,-3.77 4.69,1.29, body extent -0.51,-3.83 4.07,1.25, height 7.51
SSW-103-01-G-D [mm]
  rect 1.5x1.5 hole 1.04: 1(0,0)
  round 1.5 hole 1.04: 2(2.54,0) 3(0,-2.54) 4(2.54,-2.54) 5(0,-5.08) 6(2.54,-5.08)
  silkscreen extent -1.22,-6.58 3.75,1.58, body extent -1.2,-6.57 3.76,1.56, height 8.52
SSW-104-01-G-D [mm]
  rect 1.5x1.5 hole 1.04: 1(0,0)
  round 1.5 hole 1.04: 2(2.54,0) 3(0,-2.54) 4(2.54,-2.54) 5(0,-5.08) 6(2.54,-5.08) 7(0,-7.62) 8(2.54,-7.62)
  silkscreen extent -1.25,-9.18 3.75,1.48, body extent -1.25,-9.17 3.7,1.5, height 8.52
TO-247-4L_HSA [mm] "TO-247-4L package, horizontal, heat sink above"
  oval 2x2.8 hole 1.6: 1(0,0) 2(5.08,0) 3(7.62,0) 4(10.16,0)
  round 0.5 hole 8 unplated: *(5.08,-22.78)
  silkscreen extent -2.92,-28.76 13.08,1.89, body extent -2.88,-28.81 13.12,0.44, height 5.1